# Altium PCB OpticalSensor.PcbDoc
Units mm, origin at the board's own origin, x right, y up, seen from the top; angles counter-clockwise.
Board outline 33 x 33 mm, 4 copper layers (Top Layer, Layer 2, Layer 3, Bottom Layer), stack 0.603 mm thick; 25 components, 19 nets, 133 pads, 34 vias.
Unrouted connection lines stored in the file: 17.
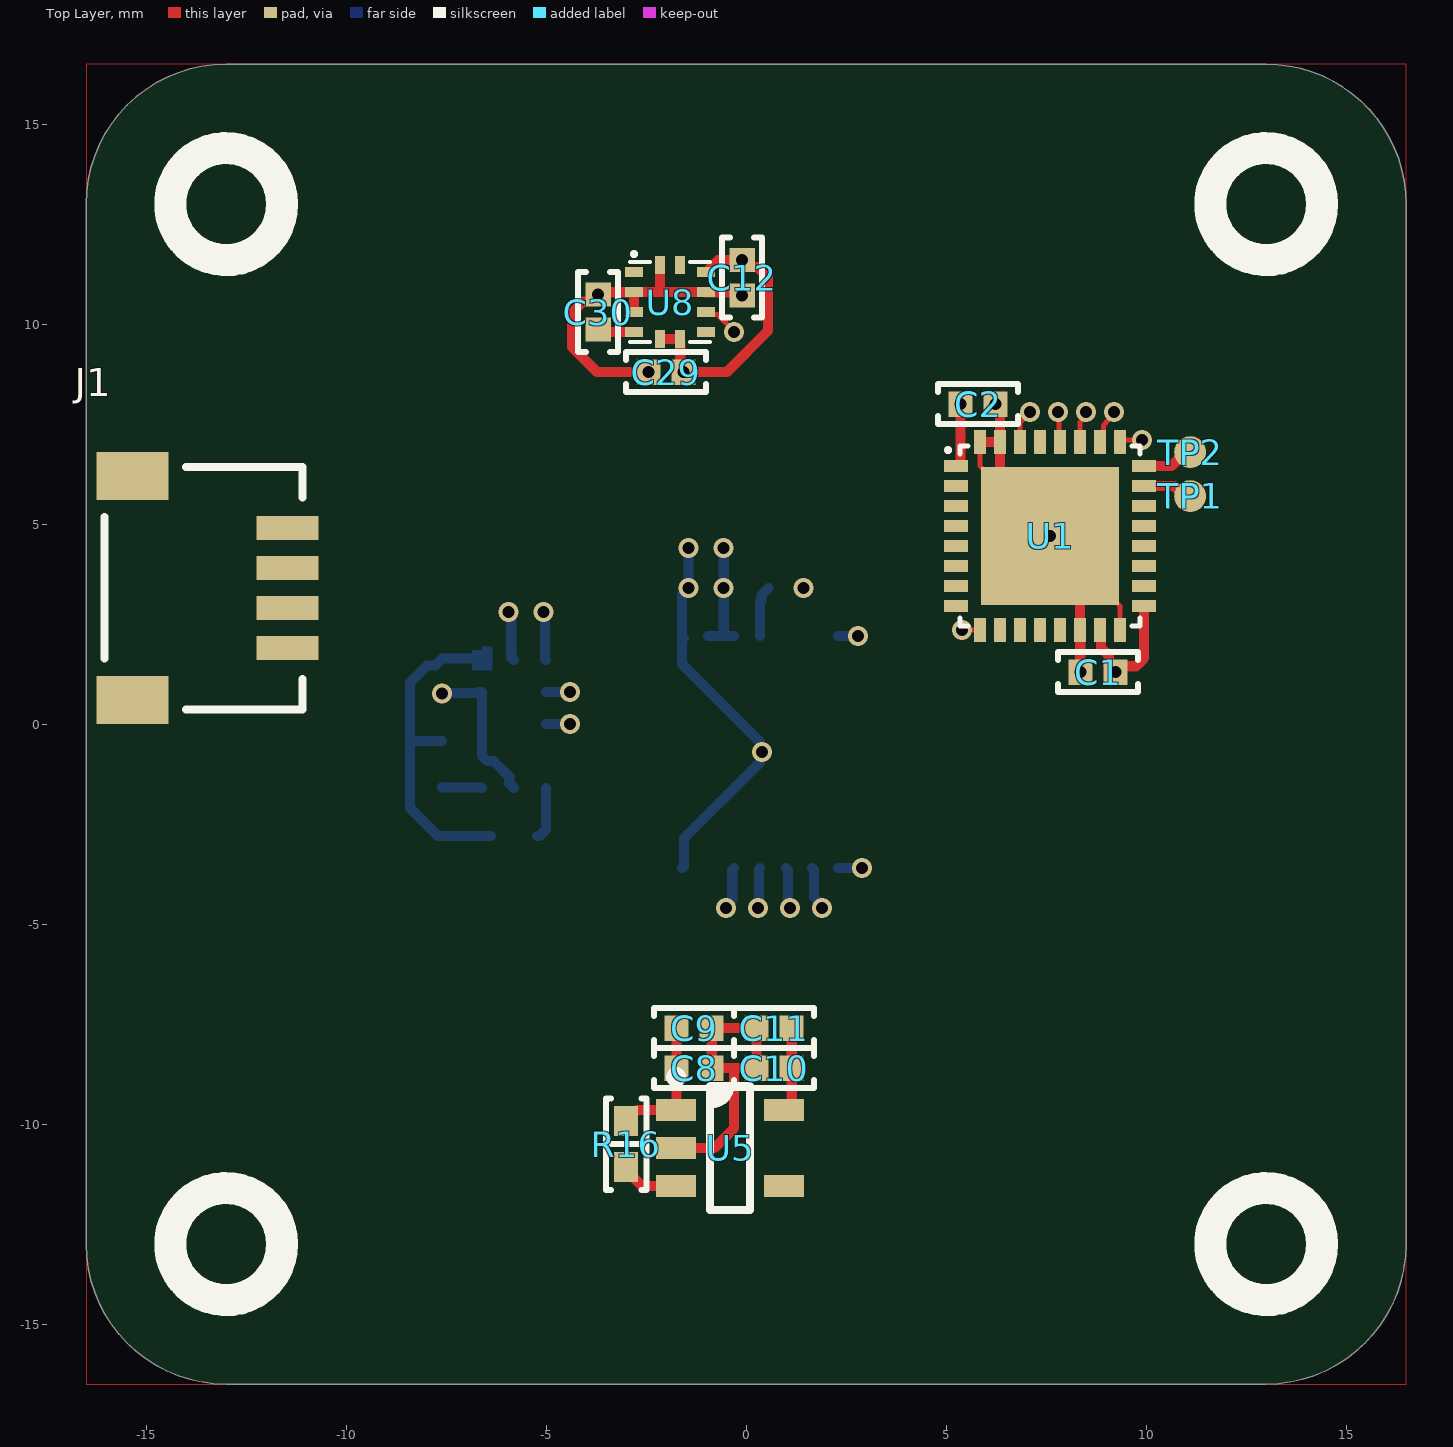
[diagram p0: Top Layer view]
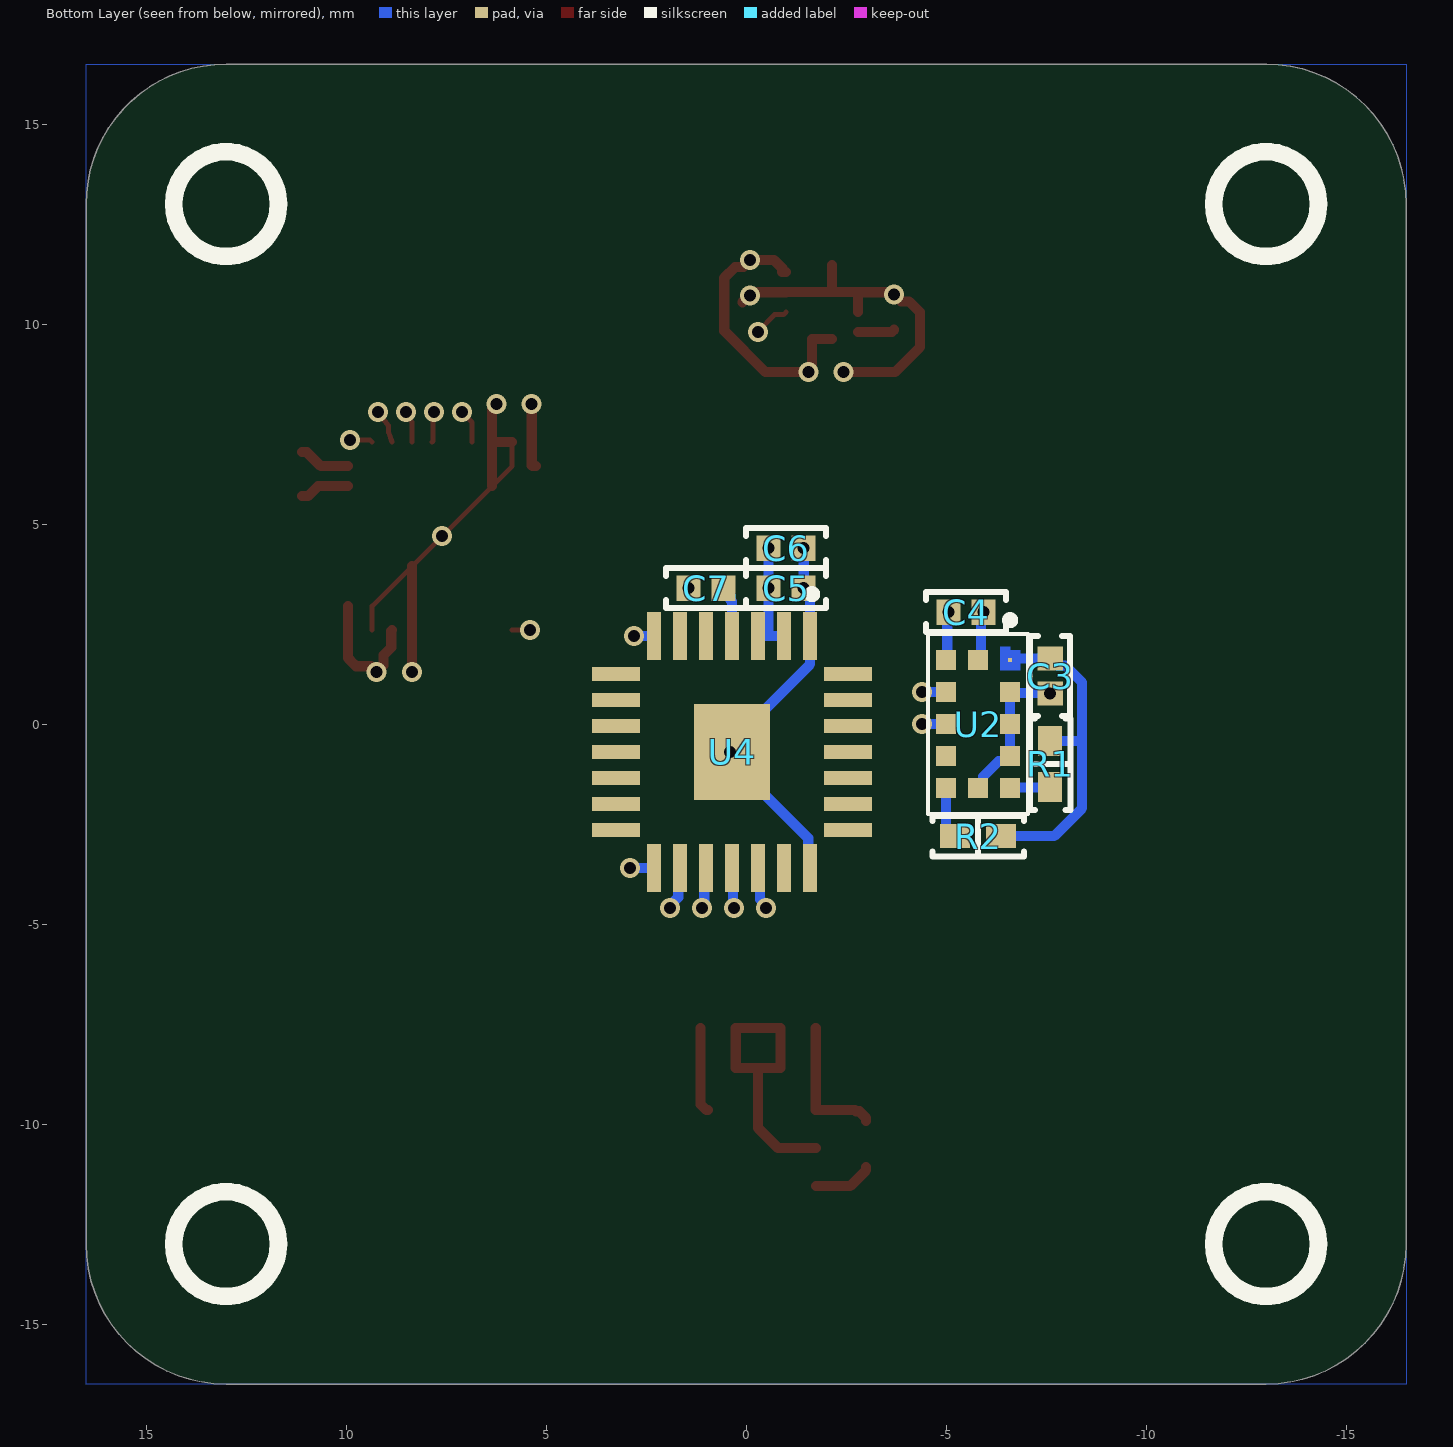
[diagram p1: Bottom Layer view, seen from below]

## Layer stack, top to bottom
Top Solder: solder mask 0.0102, Solder Resist, Dk 3.5
Top Layer: signal copper 0.0356
Dielectric 2: prepreg 0.0711, PP-006, Dk 4.1
Layer 2: signal copper 0.035
Dielectric 1: dielectric 0.32, FR-4, Dk 4.8
Layer 3: signal copper 0.035
Dielectric 3: prepreg 0.0711, PP-006, Dk 4.1
Bottom Layer: signal copper 0.0356
Bottom Solder: solder mask 0.0102, Solder Resist, Dk 3.5

## Board outline
-16.5,-13 -16.5,13 cw(c-13,13) -13,16.5 13,16.5 cw(c13,13) 16.5,13 16.5,-13 cw(c13,-13) 13,-16.5 -13,-16.5 cw(c-13,-13)

## Design rules (kind name [scope] priority, off if disabled: settings)
BoardOutlineClearance [All] p1: gap=0.2 ignorepadtopadclearanceinfootprint=FALSE
Clearance "PolyGon Pour Clearance" [InPolygon] p1: gap=0.2 ignorepadtopadclearanceinfootprint=FALSE
Clearance [All] p2: gap=0.2 ignorepadtopadclearanceinfootprint=TRUE except(0: Arc-Hole Track-Hole SMDPad-Hole THPad-Hole Via-Hole Fill-Hole Poly-Hole Region-Hole Text-Hole)
HoleSize [All] p1: absolutevalues=TRUE maxlimit=6.3 minlimit=0.02 maxpercent=80.000 minpercent=20.000
PolygonConnect PolygonRelief [IsPolygon and not (IsNamedPolygon('PolygonDirect'))] p1: thpad.connectstyle=Relief thpad.reliefconductorwidth=0.254 thpad.reliefentries=4 thpad.polygonreliefangle="90 Angle" thpad.airgapwidth=0.254 smdpad.connectstyle=Relief smdpad.reliefconductorwidth=0.254 smdpad.reliefentries=4 smdpad.polygonreliefangle="90 Angle" smdpad.airgapwidth=0.254 via.connectstyle=Direct via.reliefconductorwidth=0.254 via.reliefentries=4 via.polygonreliefangle="90 Angle" via.airgapwidth=0.254
PolygonConnect [All] p2: connectstyle=Direct reliefconductorwidth=0.254 reliefentries=4 polygonreliefangle="90 Angle" airgapwidth=0.254
RoutingVias [All] p1: holewidth=0.3 width=0.5 viastyle="Through Hole" minholewidth=0.3 minwidth=0.5 maxholewidth=0.7 maxwidth=1.27
SolderMaskExpansion [All] p1: expansion=0.102 istentingtop=FALSE
Width [All] p1: maxlimit=0.712 minlimit=0.127 preferedwidth=0.254
29 further rules are at their usual default settings.

## Classes and differential pairs
component class OpticalSensor: C5 C6 C7 J1 U4
component class U_VL53L: C3 C4 R1 R2 U2
component class U_STM32: C1 C2 TP1 TP2 U1
component class U_LIS3MDL: C12 C29 C30 U8
component class U_3V3_LDO_MCU: C8 C9 C10 C11 R16 U5

## Components (designator, comment, footprint, x,y, rotation, side; value= is the part's Value field where it differs from the comment)
C1 "0.1 µF" "CAP 0402_1005" 8.8,1.3 r0 top
C2 "0.1 µF" "CAP 0402_1005" 5.8,8 r180 top
C3 "0.1 µF" "CAP 0402_1005" -7.6,1.2 r90 bottom
C4 "0.1 µF" "CAP 0402_1005" -5.5,2.8 r0 bottom
C5 "1 µF" "CAP 0402_1005" -1,3.4 r0 bottom
C6 "1 µF" "CAP 0402_1005" -1,4.4 r0 bottom
C7 "1 µF" "CAP 0402_1005" 1,3.4 r180 bottom
C8 "1 µF" "CAP 0402_1005" -1.3,-8.6 r180 top
C9 "0.1 µF" "CAP 0402_1005" -1.3,-7.6 r180 top
C10 "0.1 µF" "CAP 0402_1005" 0.7,-8.6 r0 top
C11 "1 µF" "CAP 0402_1005" 0.7,-7.6 r0 top
C12 "1 µF" "CAP 0402_1005" -0.1,11.16 r270 top
C29 "0.1 µF" "CAP 0402_1005" -2,8.8 r180 top
C30 "0.1 µF" "CAP 0402_1005" -3.7,10.3 r90 top
J1 "SM04B-SRSS-TB(LF)(SN)" "JST SM04B-SRSS-TB" -13.5,3.4 r90 top
R1 "10k" "RES 0402_1005" -7.6,-1 r270 bottom
R2 "10k" "RES 0402_1005" -5.8,-2.8 r0 bottom
R16 "10k Ohms" "RES 0402_1005" -3,-10.5 r90 top
TP1 "0.8mm" "TP  0.8mm" 11.1,5.7 r0 top
TP2 "0.8mm" "TP  0.8mm" 11.1,6.8 r0 top
U1 "STM32G431KBU3" QFN50P400X400X60-32N 7.6,4.7 r0 top
U2 "VL53L3CXV0DH/1" XDCR_VL53L3CXV0DH/1 -5.8,0 r270 bottom
U4 "PMW3901" PMW3901 0.35,-0.7 r270 bottom
U5 "MIC5504" "TI SOT-23-5 DBV" -0.4,-10.6 r0 top
U8 "LIS3MDL" LGA12_ST -1.9,10.55 r0 top

## Footprints (in the part's own frame and the unit in brackets; to place one, negate y for a bottom-side part, rotate by r counter-clockwise, add the part's x,y. Pads: shape width x height; smd on the part's side, far side on the other; paste and mask are expansions set on the pad)
"CAP 0402_1005" [mm] "Chip Capacitor, 2-Leads, Body 1.02x0.51mm, IPC Medium Density"
  rect 0.6x0.64 smd: 1(-0.44,0) 2(0.44,0)
  silkscreen extent -1,-0.5 1,0.5, body extent -0.5,-0.26 0.5,0.26, height 0.52
"JST SM04B-SRSS-TB" [mm] "1.0mm pitch/Disconnectable Crimp style connector"
  rect 0.6x1.55 smd: 1(-1.5,-2.032) 2(-0.5,-2.032) 3(0.5,-2.032) 4(1.5,-2.032)
  rect 1.2x1.8 smd: M(-2.8,1.843) M(2.8,1.843)
  silkscreen extent -3.03,-2.41 3.03,2.54, body extent -3,-2.38 3,2.57, height 2.95
LGA12_ST [mm]
  rect 0.45x0.25 smd: 1(-0.9,0.75) 2(-0.9,0.25) 3(-0.9,-0.25) 4(-0.9,-0.75) 7(0.9,-0.75) 8(0.9,-0.25) 9(0.9,0.25) 10(0.9,0.75)
  rect 0.25x0.45 smd: 5(-0.25,-0.925) 6(0.25,-0.925) 11(0.25,0.925) 12(-0.25,0.925)
  silkscreen extent -1,-1 1,1.25, body extent -1,-1 1,1, height 0.25
PMW3901 [mm]
  rect 1.2x0.35 smd: 1(-2.9,1.95) 2(-2.9,1.3) 3(-2.9,0.65) 4(-2.9,0) 5(-2.9,-0.65) 6(-2.9,-1.3) 7(-2.9,-1.95) 15(2.9,-1.95) 16(2.9,-1.3) 17(2.9,-0.65) 18(2.9,0) 19(2.9,0.65) 20(2.9,1.3) 21(2.9,1.95)
  rect 0.35x1.2 smd: 8(-1.95,-2.9) 9(-1.3,-2.9) 10(-0.65,-2.9) 11(0,-2.9) 12(0.65,-2.9) 13(1.3,-2.9) 14(1.95,-2.9) 22(1.95,2.9) 23(1.3,2.9) 24(0.65,2.9) 25(0,2.9) 26(-0.65,2.9) 27(-1.3,2.9) 28(-1.95,2.9)
  rect 2.4x1.9 smd: 29(0,0)
  silkscreen extent -4.05,1.9 -3.85,2.1, body extent -3,-3 3,3, height 3.3
QFN50P400X400X60-32N [mm]
  rect 3.45x3.45 smd mask+0.051: 0(0,0)
  rect 0.6x0.3 smd mask+0.051: 1(-2.35,1.75) 2(-2.35,1.25) 3(-2.35,0.75) 4(-2.35,0.25) 5(-2.35,-0.25) 6(-2.35,-0.75) 7(-2.35,-1.25) 8(-2.35,-1.75) 17(2.35,-1.75) 18(2.35,-1.25) 19(2.35,-0.75) 20(2.35,-0.25) 21(2.35,0.25) 22(2.35,0.75) 23(2.35,1.25) 24(2.35,1.75)
  rect 0.3x0.6 smd mask+0.051: 9(-1.75,-2.35) 10(-1.25,-2.35) 11(-0.75,-2.35) 12(-0.25,-2.35) 13(0.25,-2.35) 14(0.75,-2.35) 15(1.25,-2.35) 16(1.75,-2.35) 25(1.75,2.35) 26(1.25,2.35) 27(0.75,2.35) 28(0.25,2.35) 29(-0.25,2.35) 30(-0.75,2.35) 31(-1.25,2.35) 32(-1.75,2.35)
  silkscreen extent -2.6,-2.25 2.25,2.25, body extent -2.25,-2.25 2.25,2.25, height 0.68
"RES 0402_1005" [mm] "Chip Resistor, 2-Leads, Body 1.0x0.5mm, IPC Medium Density"
  rect 0.75x0.6 smd: 1(-0.575,0) 2(0.575,0)
  silkscreen extent -1.14,-0.51 1.14,0.51, body extent -0.5,-0.25 0.5,0.25, height 0.35
"TI SOT-23-5 DBV" [mm] "SOT23, 5-Leads, Body 2.90x2.80mm, Pitch 0.95mm, IPC Medium Density"
  rect 1x0.55 smd: 1(-1.35,0.95) 2(-1.35,0) 3(-1.35,-0.95) 4(1.35,-0.95) 5(1.35,0.95)
  silkscreen extent -1.47,-1.55 0.5,1.9, body extent -1.44,-1.42 1.39,1.48, height 1.5
"TP  0.8mm" [mm]
  round 0.8 smd: 1(0,0)
XDCR_VL53L3CXV0DH/1 [mm]
  rect 0.1x0.1 smd paste-1 mask+0: 1(-1.6,0.8)
  rect 0.5x0.5 smd: 2(-0.8,0.8) 3(0,0.8) 4(0.8,0.8) 5(1.6,0.8) 6(1.6,0) 7(1.6,-0.8) 8(0.8,-0.8) 9(0,-0.8) 10(-0.8,-0.8) 11(-1.6,-0.8) 12(-1.6,0)
  Top Layer region: -1.35,0.55 -1.93,0.55 -1.93,0.8 -1.85,0.8 -1.85,1.05 -1.35,1.05
  silkscreen extent -2.7,-1.25 2.25,1.25, body extent -2.2,-1.2 2.2,1.2, height 1.05

## Part data
C1 C2 C3 C4 C9 C10 C29 C30: library part C0402C104K4RACAUTO, "CAP CER 0.1UF 16V X7R 0402", Device Package="0402 (1005 Metric)", Manufacturer=KEMET, Operating Temperature="-55°C ~ 125°C", Ratings=AEC-Q200, Supplier Part Number 1=399-6828-1-ND, Temperature Coefficient=X7R, Tolerance=±10%, Voltage - Rated=16V, Applications="Automotive, Bypass, Decoupling", Capacitance="0.1 µF", ComponentLink1Description=Datasheet, ComponentLink1URL=https://api.kemet.com/component-edge/download/specsheet/C0402C104K4RACAUTO.pdf, ComponentLink2Description="DigiKey Link", ComponentLink2URL=https://www.digikey.com/en/products/detail/kemet/C0402C104K4RACAUTO/3314827, LastUpdated="8/14/2022 9:05:51 PM", Lifecycle Status=Active, Minimum Order=1, Mounting Type="Surface Mount, MLCC", Package / Case="0402 (1005 Metric)", Packaging=TapeAndReel, Part Number=C0402C104K4RACAUTO, Part Status=Active, PartId=3024, Price=0.01, Series="SMD Auto X7R", Size / Dimension="0.039\" L x 0.020\" W (1.00mm x 0.50mm)", Supplier 1=DigiKey, Thickness (Max)="0.022\" (0.55mm)"
C5 C6 C7 C8 C11 C12: library part C0402C104K4RACAUTO, "CAP CER 0.1UF 16V X7R 0402", Capacitance="0.1 µF", Device Package="0402 (1005 Metric)", Manufacturer=KEMET, Operating Temperature="-55°C ~ 125°C", Ratings=AEC-Q200, Supplier Part Number 1=399-6828-1-ND, Temperature Coefficient=X7R, Tolerance=±10%, Voltage - Rated=16V, Applications="Automotive, Bypass, Decoupling", ComponentLink1Description=Datasheet, ComponentLink1URL=https://api.kemet.com/component-edge/download/specsheet/C0402C104K4RACAUTO.pdf, ComponentLink2Description="DigiKey Link", ComponentLink2URL=https://www.digikey.com/en/products/detail/kemet/C0402C104K4RACAUTO/3314827, LastUpdated="8/14/2022 9:05:51 PM", Lifecycle Status=Active, Minimum Order=1, Mounting Type="Surface Mount, MLCC", Package / Case="0402 (1005 Metric)", Packaging=TapeAndReel, Part Number=C0402C104K4RACAUTO, Part Status=Active, PartId=3024, Price=0.01, Series="SMD Auto X7R", Size / Dimension="0.039\" L x 0.020\" W (1.00mm x 0.50mm)", Supplier 1=DigiKey, Thickness (Max)="0.022\" (0.55mm)"
J1: "CONN HEADER SMD R/A 4POS 1MM", Current Rating (Amps)=0.7A, Insulation Color=Natural, Manufacturer="JST Sales America Inc.", Material Flammability Rating="UL94 V-0", Operating Temperature="-25°C ~ 85°C", Supplier Part Number 1=455-1804-1-ND, Voltage Rating=50V, ComponentLink1Description=Datasheet, ComponentLink1URL=http://www.jst-mfg.com/product/pdf/eng/eSH.pdf, ComponentLink2Description="DigiKey Link", ComponentLink2URL=http://digikey.com/product-detail/en/jst-sales-america-inc/SM04B-SRSS-TB-LF-SN/455-1804-1-ND/926875, Connector Type=Header, Contact Finish - Mating=Tin, Contact Finish - Post=Tin, Contact Material="Copper Alloy", Contact Shape=Square, Contact Type="Male Pin", Fastening Type=Push-Pull, Features="Solder Retention", Insulation Height="0.114\" (2.90mm)", Insulation Material="Polyamide (PA), Nylon", LastUpdated="1/12/2020 11:41:52 PM", Lifecycle Status=Active, Minimum Order=1, Mounting Type="Surface Mount, Right Angle", Number of Positions=4, Number of Positions Loaded=All, Number of Rows=1, Packaging=TapeAndReel, Part Number=SM04B-SRSS-TB(LF)(SN), Part Status=Active, PartId=62, Pitch - Mating="0.039\" (1.00mm)", Price=0.26, Series=SR, Shrouding="Shrouded - 4 Wall", Style="Board to Cable/Wire", Supplier 1=DigiKey, Termination=Solder
R1 R2 R16: library part CRCW0402330RJNEDC, "RES 330 OHM 5% 1/16W 0402", Device Package="0402 (1005 Metric)", Manufacturer="Vishay Dale", Operating Temperature="-55°C ~ 155°C", Power (Watts)="0.063W, 1/16W", Resistance="330 Ohms", Supplier Device Package=0402, Supplier Part Number 1=541-4123-1-ND, Temperature Coefficient=±200ppm/°C, Tolerance=±5%, ComponentLink1Description=Datasheet, ComponentLink1URL=http://www.vishay.com/docs/28773/crcwce3.pdf, ComponentLink2Description="DigiKey Link", ComponentLink2URL=https://www.digikey.com/en/products/detail/vishay-dale/CRCW0402330RJNEDC/7928545, Composition="Thick Film", Height - Seated (Max)="0.014\" (0.35mm)", LastUpdated="8/14/2022 9:23:31 PM", Lifecycle Status=Active, Minimum Order=1, Number of Terminations=2, Package / Case="0402 (1005 Metric)", Packaging=CutTape, Part Number=CRCW0402330RJNEDC, Part Status=Active, PartId=15989, Price=0.01, Series=CRCW-C, Size / Dimension="0.039\" L x 0.020\" W (1.00mm x 0.50mm)", Supplier 1=DigiKey
TP1 TP2: library part "TP 0.8mm", "Test point"
U1: "MCU UFQFPN-32"
U2: "Optical Sensor 118.110 (3m) I2C Output", Package=None, Availability=Unavailable, MF=STMicroelectronics, MP=VL53L3CXV0DH/1, Price=None, SnapEDA_Link=https://www.snapeda.com/parts/VL53L3CXV0DH/1/STMicroelectronics/view-part/4775788/?ref=snap
U4: "PMW3901. Optical Flow Sensor"
U5: library part MIC5504-3.3YM5, "3.3V LDO"
U8: "Magnetometer"

## Via types
v1: diameter 0.5, hole 0.3, Top Layer to Bottom Layer, tented both sides, 34 vias

## Nets (pads, with @x,y where several pads share a name; then routed paths per layer and width w, separated by ;. In a path a pad name is that pad's centre, name@x,y a point inside that pad or via, vN(x,y) a via of type N, cw(c..) or ccw(c..) an arc to the next point about the centre after c; other vN are vias at no path point)
3V3: C1.2 C2.2 C3.2 C4.2 C5.2 C6.2 C10.2 C11.2 C12.1 C29.1 R1.1 R2.1 U1.1 U1.15 U1.17 U2.1 U2.11 U4.2 U4.3 U5.5 U8.5 U8.6 U8.10 | length 26.8
  Top Layer w0.254: U8.5 -1.652,9.625 U8.6@-1.65,9.623 ; U8.6@-1.65,9.529 U8.6@-1.65,9.623 ; U8.6 U8.6@-1.65,9.623 ; U8.6@-1.648,9.527 -1.648,8.888 v1(-1.56,8.8) -0.484,8.8 0.547,9.831 0.547,11.155 0.275,11.427 0.073,11.427 v1(-0.1,11.6) -0.7,11.6 -0.902,11.398 -0.902,11.302 -0.904,11.3 U8.10 ; U5.5 0.992,-9.65 1.14,-9.502 C10.2 C11.2 ; U1.1 5.337,6.45 5.36,6.473 v1(5.36,8) ; U1.15 8.873,2.327 8.873,1.915 9.067,1.721 9.067,1.473 v1(9.24,1.3) ; C1.2@9.24,1.32 v1(9.24,1.3) ; 9.8,1.5 9.745,1.445 9.385,1.445 v1(9.24,1.3) ; 9.801,1.5 9.95,1.649 U1.17
  Bottom Layer w0.254: R1.1 -8.375,-0.425 -8.4,-0.4 ; U2.1 -6.64,1.64 C3.2 -7.773,1.467 -7.975,1.467 -8.4,1.042 -8.4,-0.4 ; R2.1 -7.7,-2.8 -8.4,-2.1 -8.4,-0.4 ; v1(-5.06,2.8) -5.03,2.77 -5.03,1.63 U2.11 ; U4.2 -0.625,2.2 ; v1(-0.56,4.4) v1(-0.56,3.4) -0.56,2.265 -0.625,2.2 ; U4.3 -0.625,2.2
5V: C8.2 C9.2 J1.2 R16.2 U5.1 | length 3.5
  Top Layer w0.254: R16.2 -3,-9.85 -2.827,-9.677 -2.752,-9.677 -2.725,-9.65 U5.1 -1.74,-9.64 C8.2 C9.2
GND: C1.1 C2.1 C3.1 C4.1 C5.1 C6.1 C7.1 C8.1 C9.1 C10.1 C11.1 C12.2 C29.2 C30.2 J1.1 U1.0 U1.14 U1.16 U1.31 U1.32 U2.2 U2.3 U2.4 U2.6 U2.12 U4.1 U4.21 U4.29 U5.2 U8.2 U8.3 U8.9 U8.12 | length 42.7
  Top Layer w0.127: U1.32 5.85,6.45 6.35,5.95 v1(7.6,4.7) 8.35,3.95 9.35,2.95 U1.16
  Top Layer w0.254: U8.3 U8.2 ; v1(-2.44,8.8) -3.722,8.8 -4.347,9.425 -4.347,10.295 -4.075,10.567 -3.873,10.567 v1(-3.7,10.74) -3.642,10.798 -2.802,10.798 U8.2 ; U8.12 -2.15,10.85 -2.1,10.8 ; U5.2 -0.8,-10.6 -0.3,-10.1 -0.3,-8.6 ; C12.2@0.093,10.547 -0.08,10.72 v1(-0.1,10.72) -0.178,10.798 -0.998,10.798 U8.9 -2.1,10.8 ; U1.32 U1.31 ; v1(6.24,8) 6.35,7.89 U1.31 ; U1.0@6.35,5.95 U1.31 ; U1.0@8.35,3.95 U1.14 8.355,2.345 v1(8.355,1.305) C1.1 ; U8.2 -2.1,10.8 ; -0.3,-8.6 C10.1 C11.1 C9.1 C8.1 -0.3,-8.6
  Bottom Layer w0.254: v1(-7.6,0.76) -7.58,0.78 -6.723,0.78 -6.703,0.8 U2.2 U2.3 U2.4 -6.477,-0.923 -6.315,-0.923 -5.923,-1.314 -5.923,-1.477 U2.6 ; v1(-5.94,2.8) -5.87,2.73 -5.87,1.67 U2.12 ; U4.21 -1.552,-3.552 -1.552,-2.852 0.35,-0.95 U4.29 ; U4.1@-1.552,2.152 U4.1 ; v1(-1.44,4.4) v1(-1.44,3.4) -1.6,3.24 U4.1 ; v1(0.4,-0.7) U4.29 ; U4.1 -1.6,1.5 0.35,-0.45 U4.29
  other v1: 1.44,3.4
I2C.SCL: J1.4 U1.25 U2.10 U8.1 | length 1.2
  Top Layer w0.127: U1.25 9.4,7.1 v1(9.9,7.1)
  Bottom Layer w0.254: U2.10 v1(-4.4,0.8)
I2C.SDA: J1.3 U1.30 U2.9 U8.11 | length 1.5
  Top Layer w0.127: U1.30 6.85,7.541 7.1,7.791 v1(7.1,7.8)
  Bottom Layer w0.254: U2.9 v1(-4.4,0)
LIS3_MDL_DRDY: U8.8 | length 0.9
  Top Layer w0.127: U8.8 -0.938,10.239 -0.716,10.239 -0.3,9.823 v1(-0.3,9.8)
NetC7_2: C7.2 U4.4 | length 1.3
  Bottom Layer w0.254: U4.4 0.35,3.058 0.387,3.095 0.387,3.227 C7.2
NetC30_1: C30.1 U8.4 | length 0.9
  Top Layer w0.254: C30.1 -3.642,9.802 -2.802,9.802 U8.4
NetR16_1: R16.1 U5.3 | length 1.5
  Top Layer w0.254: R16.1 -3,-11.15 -2.6,-11.55 U5.3
PMW_MOTION: U4.15 | length 0.6
  Bottom Layer w0.254: U4.15 v1(2.9,-3.6)
PMW_nRESET: U4.7 | length 0.5
  Bottom Layer w0.254: U4.7 v1(2.8,2.2)
SPI.MISO: U1.27 U4.18 | length 1.8
  Top Layer w0.127: U1.27 8.35,7.549 8.5,7.699 v1(8.5,7.8)
  Bottom Layer w0.254: v1(0.3,-4.6) 0.325,-4.575 0.325,-3.625 U4.18
SPI.MOSI: U1.28 U4.16 | length 1.9
  Top Layer w0.127: v1(7.8,7.8) 7.825,7.775 7.825,7.075 U1.28
  Bottom Layer w0.254: U4.16 1.698,-3.648 1.698,-4.331 1.9,-4.533 v1(1.9,-4.6)
SPI.nCS: U1.9 U4.19 | length 1.5
  Top Layer w0.127: v1(5.4,2.35) U1.9
  Bottom Layer w0.254: v1(-0.5,-4.6) -0.5,-4.533 -0.348,-4.381 -0.348,-3.648 U4.19
SPI.SCK: U1.26 U4.17 | length 1.9
  Top Layer w0.127: U1.26 8.936,7.287 8.936,7.459 v1(9.2,7.8)
  Bottom Layer w0.254: U4.17 1.048,-3.648 1.048,-4.481 1.1,-4.533 v1(1.1,-4.6)
SWCLK: TP2.1 U1.24 | length 1.3
  Top Layer w0.254: U1.24 10.631,6.45 10.981,6.8 TP2.1
SWDIO: TP1.1 U1.23 | length 1.3
  Top Layer w0.254: U1.23 10.702,5.95 10.952,5.7 TP1.1
VL53_GPIO1: R2.2 U2.7 | length 1.3
  Bottom Layer w0.254: R2.2 -5.173,-2.8 -5,-2.627 U2.7
VL53_XSHUT: R1.2 U2.5 | length 1
  Bottom Layer w0.254: R1.2 -7.588,-1.587 -6.613,-1.587 U2.5
pads on no net: J1.M U1.2 U1.3 U1.4 U1.5 U1.6 U1.7 U1.8 U1.10 U1.11 U1.12 U1.13 U1.18 U1.19 U1.20 U1.21 U1.22 U1.29 U2.8 U4.5 U4.6 U4.8 U4.9 U4.10 U4.11 U4.12 U4.13 U4.14 U4.20 U4.22 U4.23 U4.24 U4.25 U4.26 U4.27 U4.28 U5.4 U8.7

## Polygon pours and split planes (outlines as drawn)
GND on Bottom Layer "NONET_L04_P000" (solid, shelved, pour order 0): -16.5,16.5 -16.5,-16.5 16.5,-16.5 16.5,16.5
GND on Top Layer "NONET_L01_P001" (solid, shelved, pour order 1): -16.5,16.5 -16.5,-16.5 16.5,-16.5 16.5,16.5

## Silkscreen, mask and mechanical layers (free items; w line width, h text height)
Top Overlay:
  circle w0.8: c13,-13 r1.4
  circle w0.8: c-13,-13 r1.4
  circle w0.8: c13,13 r1.4
  circle w0.8: c-13,13 r1.4
Bottom Overlay:
  circle w0.44: c13,-13 r1.31
  circle w0.44: c-13,-13 r1.31
  circle w0.44: c13,13 r1.31
  circle w0.44: c-13,13 r1.31
Board:
  the board outline again, w0.127